# EAGLE board ProximitySwitchMOSFET (EAGLE 9.1.3)
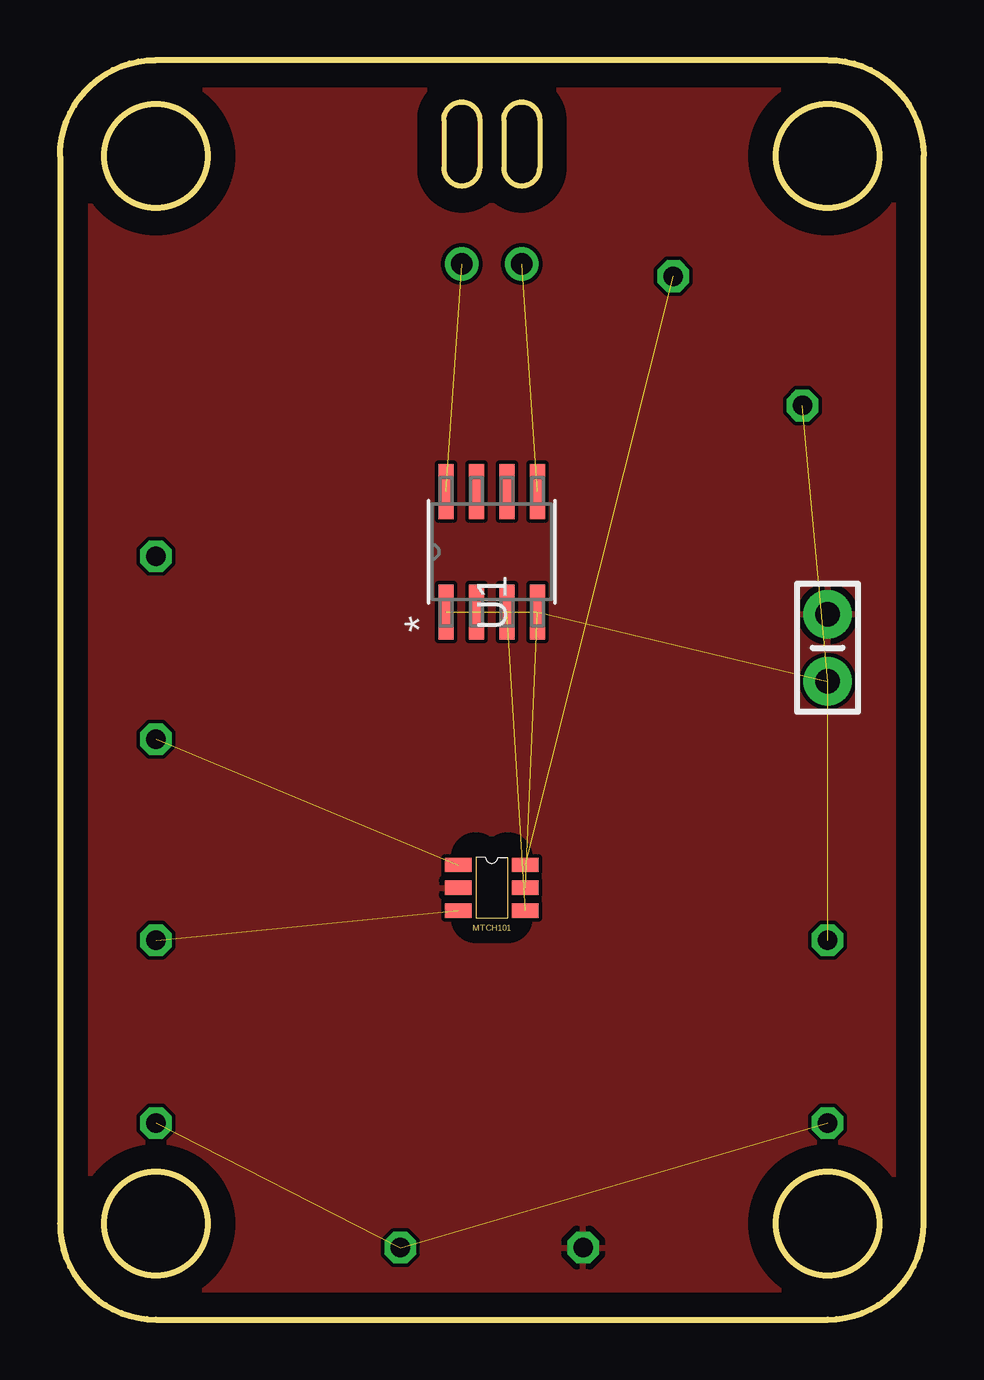
[diagram p0: board, top side]
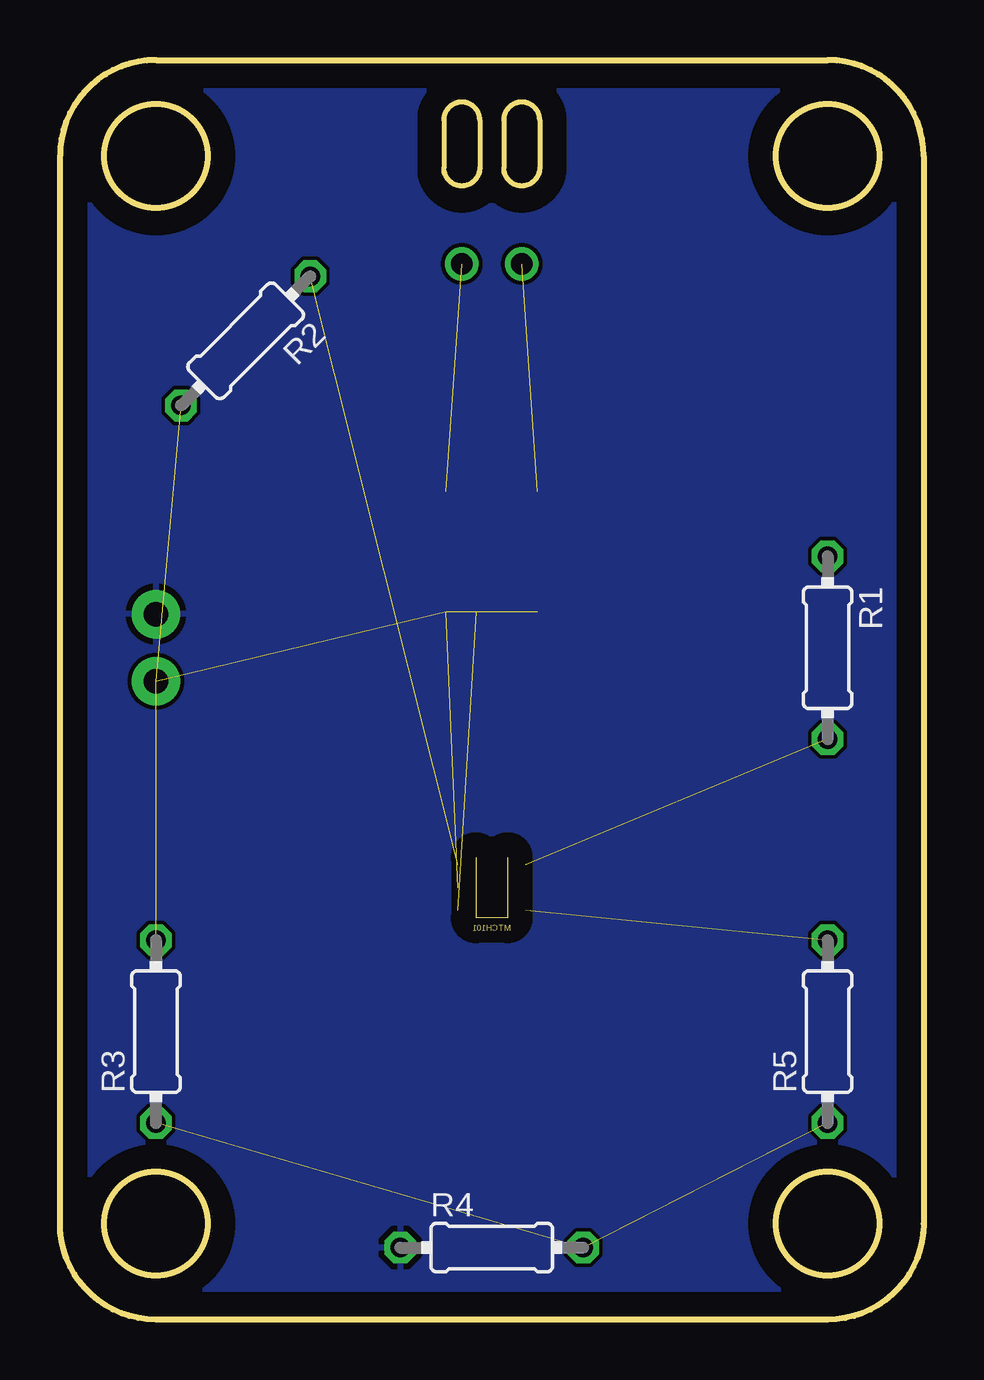
[diagram p1: board, bottom side, seen from below]

Size 36 x 52.5 mm. Coordinates in mm from the lower left corner, seen from the top.
Outline: 4,0 32,0 arc90 36,4 36,48.5 arc90 32,52.5 4,52.5 arc90 0,48.5 0,4 arc90 4,0
Outline: circle at 4,48.5 radius 2.15
Outline: circle at 32,48.5 radius 2.15
Outline: circle at 4,4 radius 2.15
Outline: circle at 32,4 radius 2.15
Copper layers (1*16): Top 0.035mm / dielectric 1.5mm / Bottom 0.035mm
Design rules "default": minimum track width 6mil, minimum drill 0.35mm, track to track 6mil, track to pad 6mil, pad to pad 6mil, via to via 6mil, smd to smd 6mil, copper to edge 40mil, drill to drill 6mil, minimum pad ring 10mil, minimum via ring 8mil, stop-mask expansion 4mil, vias tented up to drill 0mil, thermal gap 10mil

## Footprints (pad centres in the part's own frame; a part is rotated, then mirrored left to right if it is on the bottom)
CAP-PTH-SMALL-KIT = drill 1.016 pad 2.032: 1 -1.397,0; 2 1.397,0
RESISTOR_0204/7 = drill 0.813 octagon: 1 -3.81,0; 2 3.81,0
M08A-M = smd 2.286 x 0.61: 1 -2.515,1.905; 2 -2.515,0.635; 3 -2.515,-0.635; 4 -2.515,-1.905; 5 2.515,-1.905; 6 2.515,-0.635; 7 2.515,0.635; 8 2.515,1.905
MTCH101 = smd 0.6 x 1.1: MTI -0.95,-1.4; MTO 0.95,1.4; MTPM -0.95,1.4; MTSA 0.95,-1.4; VDD 0,1.4; VSS 0,-1.4
MONO_WIRE = drill 0.9: P$1 -1.25,0; P$2 1.25,0

## Placement (x,y rotation side)
C1  0.1uF  [CAP-PTH-SMALL-KIT]  32,28 90 top
R1  [RESISTOR_0204/7]  4,28 270 bottom
R2  [RESISTOR_0204/7]  28.26,40.79 225 bottom
R3  [RESISTOR_0204/7]  32,12 90 bottom
R4  [RESISTOR_0204/7]  18,3 0 bottom
R5  [RESISTOR_0204/7]  4,12 90 bottom
U1  4936BM08A-M  [M08A-M]  18,32 90 top
U$1  MTCH101  [MTCH101]  18,18 270 top
U$2  MONO_WIRE  [MONO_WIRE]  18,44 0 top

## Library data of the parts
C1 = MMC Eagle; PROD_ID: CAP-08370
R1-R5 U$1 U$2 = MMC Eagle
U1 = MMC Eagle; MANUFACTURER_PART_NUMBER: LM34DM; VENDOR: Texas Instruments

## Nets
GND: C1.2 R4.1 U$1.VSS
N$1: R5.2 U$1.MTSA
N$2: R3.1 R4.2 R5.1
N$3: R1.2 U$1.MTI
N$4: R2.1 U$1.MTPM
N$5: U1.1 U1.3 U$1.MTO
N$6: U1.5 U$2.P$2
N$7: C1.1 R2.2 R3.2 U1.2 U1.4 U$1.VDD
N$8: U1.8 U$2.P$1
PANNEL: R1.1

## Tracks (layer width: path | path; a pad name or v marks a point on that pad's centre or on a via)
GND
  pour Top: 0,-1 37,-1 37,53 -0.5,53 -0.5,-1
  pour Bottom: -0.5,53 38,53 38,35 38,-1 -0.5,-1
N$1  (1 unrouted)
N$2  (2 unrouted)
N$3  (1 unrouted)
N$4  (1 unrouted)
N$5  (2 unrouted)
N$6  (1 unrouted)
N$7  (5 unrouted)
N$8  (1 unrouted)